# Altium PCB imu_69.PcbDoc
Units mm, origin at the board's own origin, x right, y up, seen from the top; angles counter-clockwise.
Board outline 52.4 x 5 mm, 2 copper layers (Top, Bottom); 9 components, 10 nets, 60 pads, 18 vias.
Unrouted connection lines stored in the file: 2.
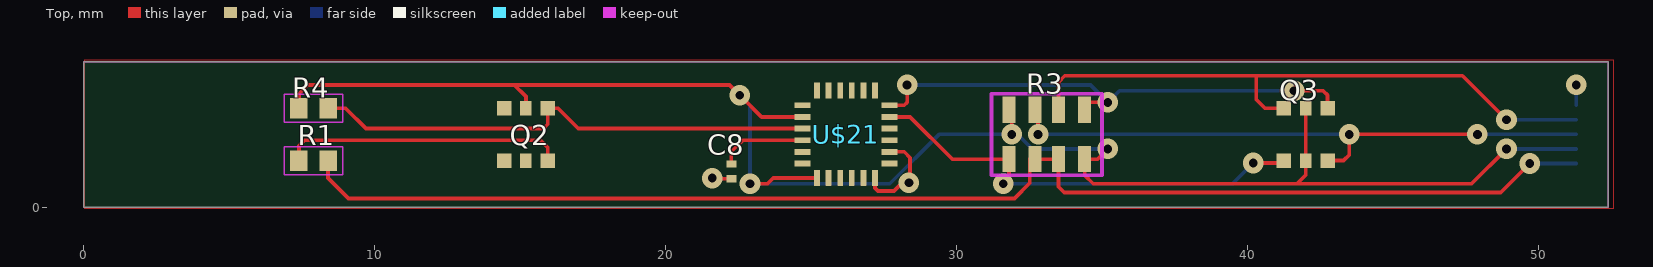
[diagram p0: Top view]
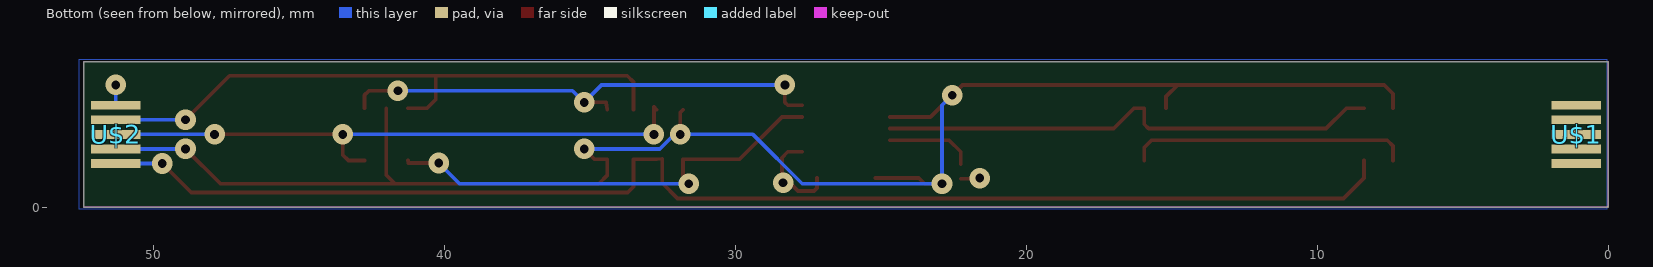
[diagram p1: Bottom view, seen from below]

## Layer stack, top to bottom
Top Solder: solder mask 0.0102, Solder Resist, Dk 3.5
Top: signal copper 0.035
Dielectric 1: dielectric 0.32, FR-4, Dk 4.8
Bottom: signal copper 0.035
Bottom Solder: solder mask 0.0102, Solder Resist, Dk 3.5

## Board outline
0,5 0,0 52.4,0 52.4,5

## Design rules (kind name [scope] priority, off if disabled: settings)
BoardOutlineClearance mdCopperDimension [All] p1: gap=0.254 ignorepadtopadclearanceinfootprint=FALSE except(0: Arc-SplitContinuation Track-SplitContinuation SMDPad-SplitContinuation THPad-SplitContinuation Via-SplitContinuation Fill-SplitContinuation Poly-SplitContinuation Region-SplitContinuation Text-SplitContinuation; 0.2: Poly-OutlineEdge Poly-CavityEdge Poly-CutoutEdge Poly-SplitBarrior)
Clearance "Clearance (Same Net)" [All] p1: gap=0.127 ignorepadtopadclearanceinfootprint=FALSE
Clearance [All] p2: gap=0.127 ignorepadtopadclearanceinfootprint=FALSE
HoleSize HoleSize_For_NetClass_lowpower [InNetClass('lowpower')] p1: absolutevalues=TRUE maxlimit=0.483 minlimit=0.483 maxpercent=80.000 minpercent=20.000
HoleSize HoleSize_For_NetClass_highpower [InNetClass('highpower')] p2: absolutevalues=TRUE maxlimit=0.483 minlimit=0.483 maxpercent=80.000 minpercent=20.000
HoleSize [All] p3: absolutevalues=TRUE maxlimit=2540 minlimit=0.3 maxpercent=80.000 minpercent=20.000
HoleToHoleClearance mdDrill [All] p1: gap=0.152 allowstackedmicrovias=TRUE
MinimumSolderMaskSliver [All] p1 off: minsoldermaskwidth=0.254
PasteMaskExpansion mlMinCreamFrame [All] p1: expansion=0
PolygonConnect PolygonConnect_For_PolygonThermal_ON_Width50000_Gap100000 [InPolygonClass('PolygonThermal_ON_Width50000_Gap100000') vs Not IsVia] p1: connectstyle=Relief reliefconductorwidth=0.127 reliefentries=4 polygonreliefangle="90 Angle" airgapwidth=0.254
PolygonConnect ThermalVias [IsVia] p2: connectstyle=Direct reliefconductorwidth=0.254 reliefentries=4 polygonreliefangle="90 Angle" airgapwidth=0.254
PolygonConnect [All] p3: connectstyle=Relief reliefconductorwidth=0.254 reliefentries=4 polygonreliefangle="90 Angle" airgapwidth=0.254
RoutingVias [All] p1: holewidth=0.3 width=0.452 viastyle="Through Hole" minholewidth=0.3 minwidth=0.452 maxholewidth=2.54 maxwidth=2.54
SolderMaskExpansion mlMinStopFrame [All] p1: expansion=0.102 istentingtop=FALSE
Width Width_For_NetClass_lowpower [InNetClass('lowpower')] p1: maxlimit=0.61 minlimit=0.254 preferedwidth=0.305
Width Width_For_NetClass_highpower [InNetClass('highpower')] p2: maxlimit=0.813 minlimit=0.254 preferedwidth=0.406
Width [All] p3: maxlimit=0.254 minlimit=0.127 preferedwidth=0.127
26 further rules are at their usual default settings.

## Classes and differential pairs
polygon class PolygonThermal_ON_Width50000_Gap100000: Polygon_1_Net_GND Polygon_2_Net_GND

## Components (designator, comment, footprint, x,y, rotation, side; value= is the part's Value field where it differs from the comment)
C8 "0.1uF" C0201 22.26,1.23 r270 top
Q2 "BSS138" SOT363 15.2,2.5 r0 top
Q3 "BSS138" SOT363 42,2.5 r180 top
R1 "4.7k" R0402 7.9,1.6 r0 top
R3 "10K" RESPACK_4X0603 33.1,2.5 r0 top
R4 "4.7k" R0402 7.9,3.4 r180 top
U$1 "FPC05050505" FPB0505 1,2.5 r90 bottom
U$2 "FPC05050505" FPB0505 51.2,2.5 r90 bottom
U$21 "" QFN24_3MM_NOEP 26.2,2.5 r270 top

## Footprints (in the part's own frame and the unit in brackets; to place one, negate y for a bottom-side part, rotate by r counter-clockwise, add the part's x,y. Pads: shape width x height; smd on the part's side, far side on the other; paste and mask are expansions set on the pad)
C0201 [mm] "C0201"
  rect 0.25x0.35 smd: 1(-0.25,0) 2(0.25,0)
FPB0505 [mm] "FPB0505"
  rrect3% 0.3x1.7 smd: P$1(-1,0.1) P$2(-0.5,0.1) P$3(0,0.1) P$4(0.5,0.1) P$5(1,0.1)
QFN24_3MM_NOEP [mm] "QFN24_3MM_NOEP"
  rect 0.55x0.2 smd: 1(-1.5,1) 2(-1.5,0.6) 3(-1.5,0.2) 4(-1.5,-0.2) 5(-1.5,-0.6) 6(-1.5,-1) 13(1.5,-1) 14(1.5,-0.6) 15(1.5,-0.2) 16(1.5,0.2) 17(1.5,0.6) 18(1.5,1)
  rect 0.2x0.55 smd: 7(-1,-1.5) 8(-0.6,-1.5) 9(-0.2,-1.5) 10(0.2,-1.5) 11(0.6,-1.5) 12(1,-1.5) 19(1,1.5) 20(0.6,1.5) 21(0.2,1.5) 22(-0.2,1.5) 23(-0.6,1.5) 24(-1,1.5)
R0402 [mm] "R0402"
  rect 0.6x0.7 smd: 1(-0.5,0) 2(0.5,0)
  Top keep-out lines w0.051: -1,-0.483 -1,0.483 1,0.483 1,-0.483 -1,-0.483
RESPACK_4X0603 [mm] "RESPACK_4X0603"
  rect 0.45x0.9 smd: 1(-1.3,-0.85) 2(-0.4,-0.85) 3(0.4,-0.85) 4(1.3,-0.85) 5(1.3,0.85) 6(0.4,0.85) 7(-0.4,0.85) 8(-1.3,0.85)
  Top keep-out lines w0.127: -1.9,-1.4 1.9,-1.4 1.9,1.4 -1.9,1.4 -1.9,-1.4
SOT363 [mm] "SOT363"
  rect 0.5x0.5 smd: 1(-0.75,-0.9) 3(0.75,-0.9) 4(0.75,0.9) 6(-0.75,0.9)
  rect 0.4x0.5 smd: 2(0,-0.9) 5(0,0.9)

## Part data
C8: library part C0201, PackageName=C0201
Q2 Q3: library part SOT363, PackageName=SOT363
R1 R4: library part R0402, PackageName=R0402
R3: library part RESPACK_4X0603, PackageName=RESPACK_4X0603
U$1 U$2: library part FPB0505, PackageName=FPB0505
U$21: library part QFN24_3MM_NOEP, PackageName=QFN24_3MM_NOEP

## Via types
v1: diameter 0.706/0.706 (per signal layer), hole 0.3, Top to Bottom, 18 vias

## Nets (pads, with @x,y where several pads share a name; then routed paths per layer and width w, separated by ;. In a path a pad name is that pad's centre, name@x,y a point inside that pad or via, vN(x,y) a via of type N, cw(c..) or ccw(c..) an arc to the next point about the centre after c; other vN are vias at no path point)
1.8V: Q2.5 Q3.2 Q3.5 R3.4 R3.8 R4.2 U$2.P$2 U$21.8 U$21.13 | length 60.8
  Top w0.127: R4.2 7.4,3.9 7.7,4.2 14.8,4.2 ; Q2.5 15.2,3.8 14.8,4.2 ; v1(22.9,0.8) 23.5,0.8 23.7,1 U$21.13 ; U$21.8 23.3,3.1 v1(22.55,3.85) 22.2,4.2 14.8,4.2 ; R3.8 31.9,3.25 v1(31.9,2.5) ; v1(35.2,2) 34.85,1.65 R3.4 34.4,1.1 34.7,0.8 41.7,0.8 ; Q3.2 Q3.5 42,1.1 41.7,0.8 ; v1(48.9,2) 47.7,0.8 41.7,0.8
  Bottom w0.127: v1(22.55,3.85) 22.9,3.5 v1(22.9,0.8) 27.7,0.8 29.4,2.5 v1(31.9,2.5) 32.1,2.5 32.6,2 v1(35.2,2) ; v1(48.9,2) U$2.P$2
GND: C8.2 U$2.P$5 U$21.18 U$21.20 | length 4.7
  Top w0.127: v1(21.6,1) 21.62,0.98 C8.2 ; U$21.18 27.2,0.654 27.3,0.554 27.854,0.554 v1@28.25,0.95 ; U$21.20 28.2,1.9 28.4,1.7 28.4,1.1 v1@28.25,0.95 ; v1(28.362,0.838) v1@28.25,0.95
  Bottom w0.127: U$2.P$5 v1(51.3,4.2)
REGOUT: C8.1 U$21.10 | length 3
  Top w0.127: C8.1 22.26,1.9 22.66,2.3 U$21.10
SCK/SCL: Q3.3 R3.6 U$2.P$4 | length 21.4
  Top w0.127: R3.6 33.5,4.3 33.716,4.517 40.3,4.517 ; Q3.3 40.6,3.4 40.3,3.7 40.3,4.517 ; v1(48.9,3) 47.383,4.517 40.3,4.517
  Bottom w0.127: v1(48.9,3) U$2.P$4
SCK/SCL_1.8V: Q3.4 R3.1 U$21.23 | length 16.2
  Top w0.127: U$21.23@27.9,3.1 U$21.23 28.4,3.1 29.85,1.65 R3.1 ; v1(31.6,0.8) 31.8,1 R3.1 ; R3.1@31.8,1.3 R3.1 ; v1(40.2,1.517) 41.233,1.517 Q3.4
  Bottom w0.127: v1(31.6,0.8) 39.483,0.8 v1(40.2,1.517)
SDI/SDA: Q3.6 R3.7 U$2.P$3 | length 21.1
  Top w0.127: R3.7 32.8,3.45 v1(32.8,2.5) ; Q3.6 43.3,1.6 43.5,1.8 v1(43.5,2.5) v1(47.9,2.5)
  Bottom w0.127: v1(32.8,2.5) v1(43.5,2.5) ; v1(47.9,2.5) U$2.P$3
SDI/SDA_1.8V: Q3.1 R3.5 U$21.24 | length 17.6
  Top w0.127: U$21.24 28.2,3.5 28.3,3.6 v1(28.3,4.2) ; R3.5 34.45,3.6 v1(35.2,3.6) ; v1(41.6,4.003) 42.597,4.003 42.75,3.85 Q3.1
  Bottom w0.127: v1(28.3,4.2) 34.6,4.2 v1(35.2,3.6) 35.603,4.003 v1(41.6,4.003)
SDO/ADR: Q2.3 R1.1 | length 9.7
  Top w0.127: R1.1 7.4,2.1 7.6,2.3 15.7,2.3 15.95,2.05 Q2.3
SDO/ADR_1.8V: Q2.4 R4.1 U$21.9 | length 17.5
  Top w0.127: R4.1 9,3.4 9.7,2.7 15.8,2.7 15.95,2.85 Q2.4 16.3,3.4 17,2.7 U$21.9
VIN: R1.2 R3.2 R3.3 U$2.P$1 | length 46.3
  Top w0.127: R1.2 8.4,1 9.1,0.3 31.989,0.3 32.517,0.827 32.517,1.667 R3.2 R3.3 33.5,0.7 33.7,0.5 48.7,0.5 v1(49.7,1.5)
  Bottom w0.127: v1(49.7,1.5) U$2.P$1
pads on no net: Q2.1 Q2.2 Q2.6 U$1.P$1 U$1.P$2 U$1.P$3 U$1.P$4 U$1.P$5 U$21.1 U$21.2 U$21.3 U$21.4 U$21.5 U$21.6 U$21.7 U$21.11 U$21.12 U$21.14 U$21.15 U$21.16 U$21.17 U$21.19 U$21.21 U$21.22

## Polygon pours and split planes (outlines as drawn)
GND on Top "Polygon_1_Net_GND" (solid, remove dead copper, pour order 1): 0.036,5.063 52.563,5.063 52.563,-0.064 0.036,-0.064
GND on Bottom "Polygon_2_Net_GND" (solid, remove dead copper, pour order 0): 0.036,5.063 52.563,5.063 52.563,-0.064 0.036,-0.064

## Keep-outs
Keep-Out Layer:
  the board outline again, w0

## Silkscreen, mask and mechanical layers (free items; w line width, h text height)
Dimension:
  the board outline again, w0
bPlace:
  text "OUT" at 2.242,0.409 h0.69
  text "IN" at 51.8,0.3 h0.69